# Altium PCB PCB1.PcbDoc
Units mm, origin at the board's own origin, x right, y up, seen from the top; angles counter-clockwise.
Board outline 16.76 x 25.02 mm, 2 copper layers (Top Layer, Bottom Layer); 10 components, 7 nets, 36 pads, 60 vias.
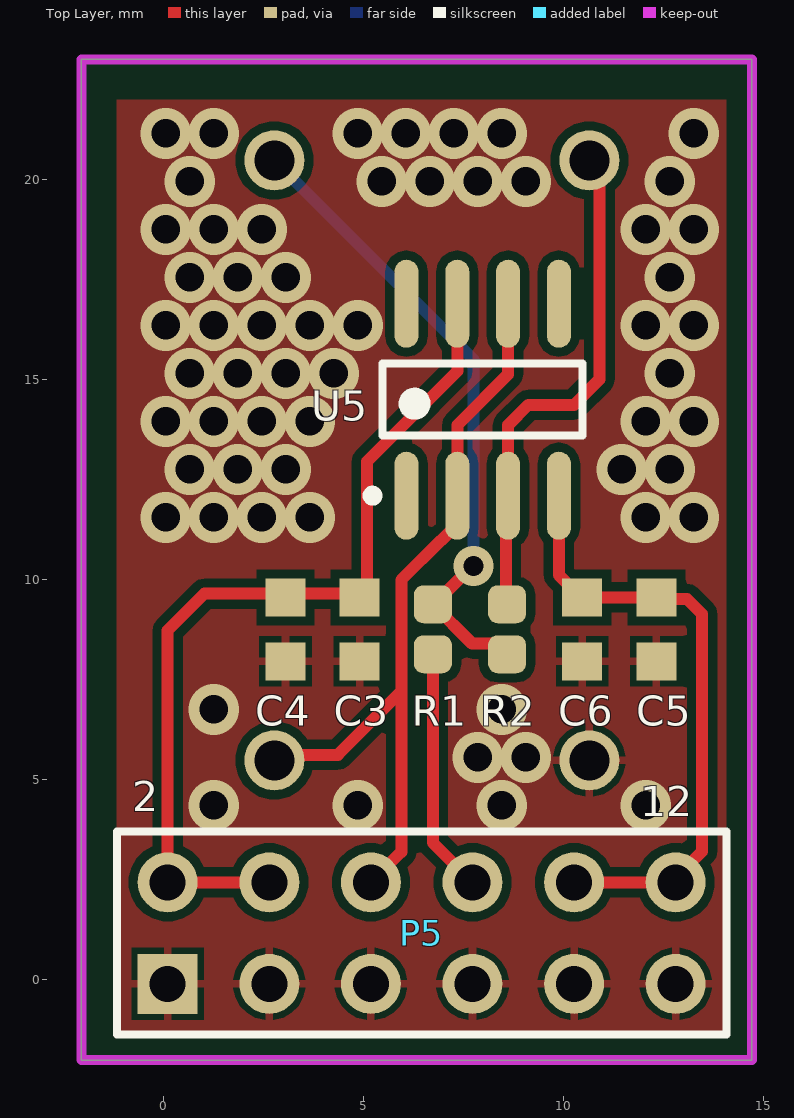
[diagram p0: Top Layer view]
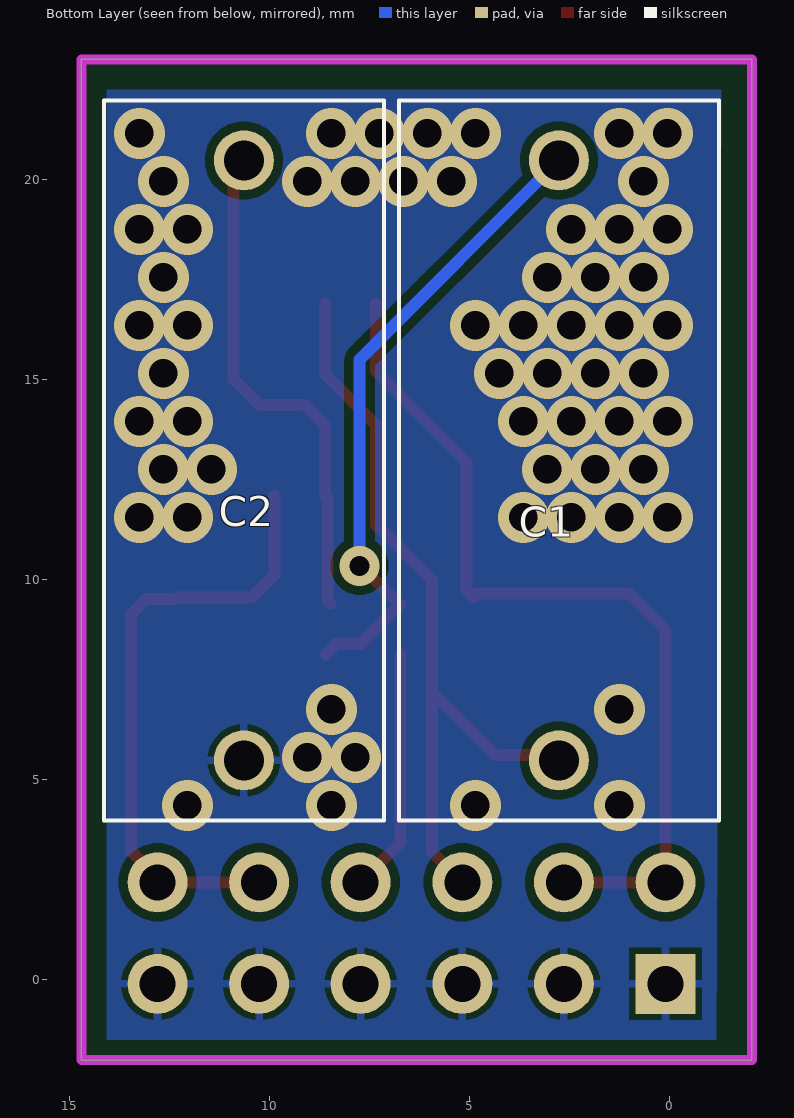
[diagram p1: Bottom Layer view, seen from below]
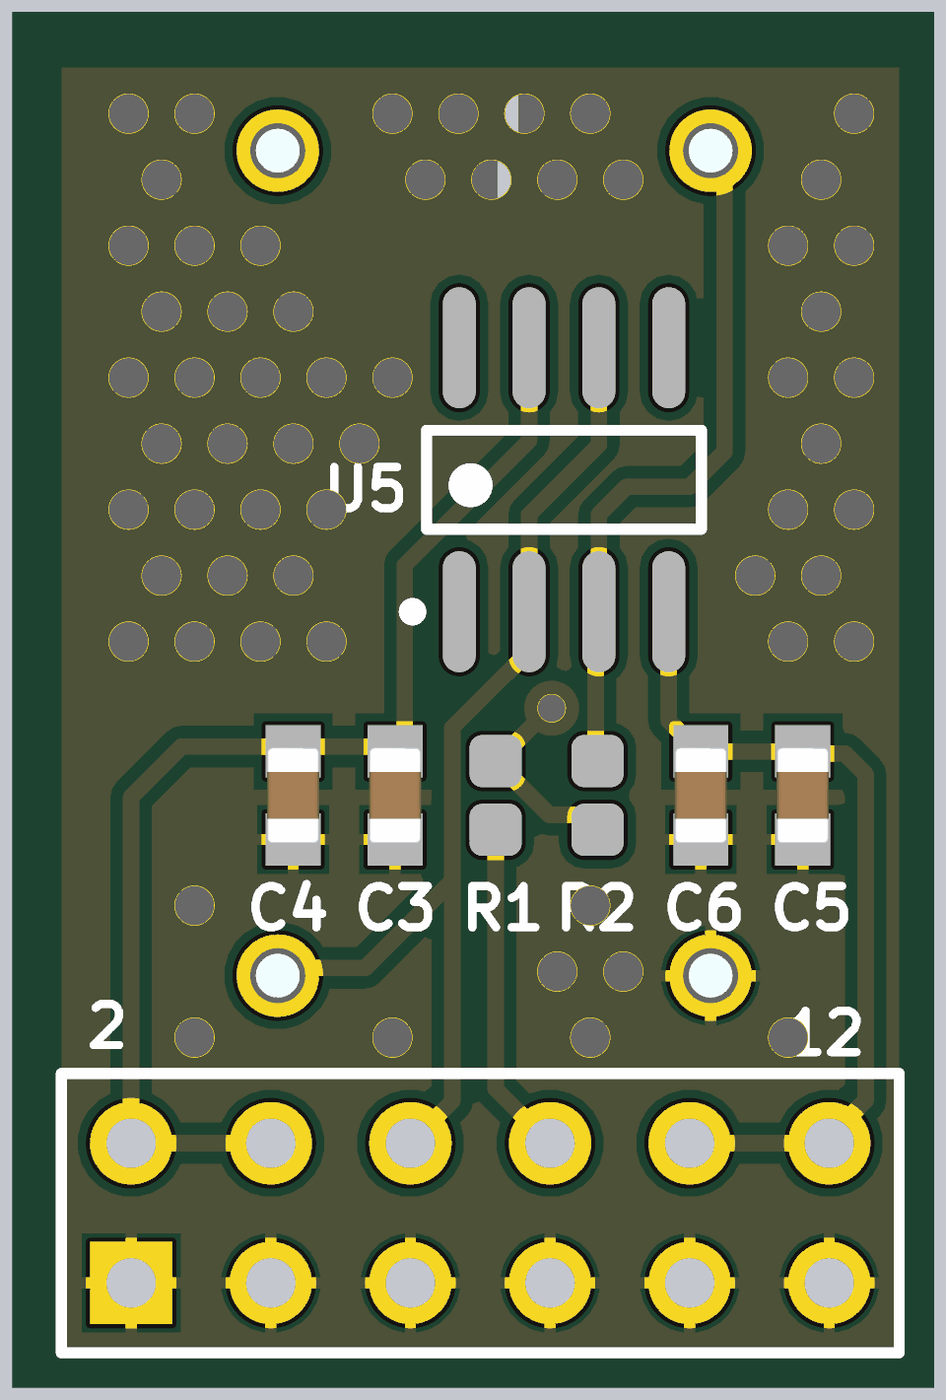
[diagram p2: 3D render of the assembled board from above, using the file's embedded part models]

## Layer stack, top to bottom
Top Solder: solder mask 0.0102, Solder Resist, Dk 3.5
Top Layer: signal copper 0.0356
Dielectric 1: dielectric 0.32, FR-4, Dk 4.8
Bottom Layer: signal copper 0.0356
Bottom Solder: solder mask 0.0102, Solder Resist, Dk 3.5

## Board outline
-2.057,-2.007 14.707,-2.007 14.707,23.012 -2.057,23.012

## Design rules (kind name [scope] priority, off if disabled: settings)
BoardOutlineClearance [All] p1: gap=0.381 ignorepadtopadclearanceinfootprint=FALSE
Clearance Clearance_Polygon [All vs InPoly] p1: gap=0.22 ignorepadtopadclearanceinfootprint=FALSE except(0: Arc-Hole Track-Hole SMDPad-Hole THPad-Hole Via-Hole Fill-Hole Poly-Hole Region-Hole Text-Hole)
Clearance [All] p2: gap=0.152 ignorepadtopadclearanceinfootprint=FALSE except(0: Arc-Hole Track-Hole SMDPad-Hole THPad-Hole Via-Hole Fill-Hole Poly-Hole Region-Hole Text-Hole)
ComponentClearance [All] p1 off: gap=0.025 collisioncheckmode=3 verticalgap=0.025 showdistances=FALSE
DiffPairsRouting [All] p1: maxlimit=10 minlimit=0.152 mostfreqgap=0.203 toplayer_minwidth=0.152 toplayer_maxwidth=0.381 toplayer_prefwidth=0.203 bottomlayer_minwidth=0.152 bottomlayer_maxwidth=0.381 bottomlayer_prefwidth=0.203 maxuncoupledlength=12.7
HoleSize [All] p1: absolutevalues=TRUE maxlimit=6.731 minlimit=0.33 maxpercent=80.000 minpercent=20.000
HoleToHoleClearance [All] p1: gap=0.254 allowstackedmicrovias=FALSE
MinimumAnnularRing [All] p1 off: minimumring=0.178
MinimumSolderMaskSliver [All] p1: minsoldermaskwidth=0
PlaneClearance [All] p1: clearance=0.254
PlaneConnect [All] p1: planeconnectstyle=Direct reliefexpansion=0.406 reliefentries=4 reliefconductorwidth=0.152 reliefairgap=0.152
PolygonConnect sticing [All vs IsStitchingVia] p1: connectstyle=Direct reliefconductorwidth=0.254 reliefentries=4 polygonreliefangle="90 Angle" airgapwidth=0.254
PolygonConnect [All] p2: connectstyle=Relief reliefconductorwidth=0.203 reliefentries=4 polygonreliefangle="90 Angle" airgapwidth=0.152
RoutingCorners [All] p1: cornerstyle=45-Degree minsetback=1.25 maxsetback=1.25
RoutingVias [All] p1: holewidth=0.381 width=0.762 viastyle="Through Hole" minholewidth=0.33 minwidth=0.686 maxholewidth=2.54 maxwidth=2.896
SilkToSilkClearance [All] p1: silktosilkclearance=0
SilkToSolderMaskClearance [IsPad] p1 off: minsilkscreentomaskgap=0.152 clearancetoexposedcopper=TRUE
SolderMaskExpansion [All] p1: expansion=0.075 istentingtop=FALSE
Width [All] p1: maxlimit=10.16 minlimit=0.152 preferedwidth=0.3
20 further rules are at their usual default settings.

## Components (designator, comment, footprint, x,y, rotation, side; value= is the part's Value field where it differs from the comment)
C1 "MKP4F036804F00KSSD" MKP4F036804F00KSSD 2.769,20.486 r270 bottom
C2 "MKP4D034704D00KSSD" MKP4D034704D00KSSD 10.643,5.486 r90 bottom
C3 "1uF" CAPC1608X87N 4.902,8.763 r90 top
C4 "100nF" CAPC1608X87N 3.048,8.763 r90 top
C5 "100nF" CAPC1608X87N 12.319,8.763 r90 top
C6 "1uF" CAPC1608X87N 10.465,8.763 r90 top
P5 "LPF mezzanine board" HDR2X6 0.102,-0.102 r0 top
R1 "100K" "Yegeo 0603" 6.731,8.763 r270 top
R2 "100K" "Yegeo 0603" 8.586,8.763 r270 top
U5 "OPA140AIDR" TI-D8_N 7.976,14.503 r90 top

## Footprints (in the part's own frame and the unit in brackets; to place one, negate y for a bottom-side part, rotate by r counter-clockwise, add the part's x,y. Pads: shape width x height; smd on the part's side, far side on the other; paste and mask are expansions set on the pad)
CAPC1608X87N [mm] "Chip Capacitor, Body 1.6x0.8mm IPC Medium Density"
  rect 0.95x1 smd: 1(-0.8,0) 2(0.8,0)
  body extent -0.87,-0.47 0.88,0.48, height 0.87
HDR2X6 [mm] "Connector; Header; 6x2 Position"
  rect 1.5x1.5 hole 0.9: 1(0,0)
  round 1.5 hole 0.9: 2(0,2.54) 3(2.54,0) 4(2.54,2.54) 5(5.08,0) 6(5.08,2.54) 7(7.62,0) 8(7.62,2.54) 9(10.16,0) 10(10.16,2.54) 11(12.7,0) 12(12.7,2.54)
  silkscreen extent -1.27,-1.27 13.97,3.81
MKP4D034704D00KSSD [mm]
  round 1.5 hole 1: 1(0,0) 2(15,0)
  silkscreen extent -1.5,-3.5 16.5,3.5, body extent -1.5,-3.5 16.5,3.5, height 14.1
MKP4F036804F00KSSD [mm]
  round 1.5 hole 1: 1(0,0) 2(15,0)
  silkscreen extent -1.5,-4 16.5,4, body extent -1.5,-4 16.5,4, height 15.1
TI-D8_N [mm] "SOIC, 8-Leads, Body 4.9x3.9mm, Pitch 1.27mm, IPC Medium Density"
  oval 2.2x0.6 smd: 1(-2.4,1.905) 2(-2.4,0.635) 3(-2.4,-0.635) 4(-2.4,-1.905) 5(2.4,-1.905) 6(2.4,-0.635) 7(2.4,0.635) 8(2.4,1.905)
  silkscreen extent -2.52,-2.5 0.9,2.88, body extent -2,-2.5 2,2.5, height 1.75
"Yegeo 0603" [mm]
  rrect50% 0.95x0.95 smd: 1(-0.625,0) 2(0.625,0)
  body extent -0.85,-0.45 0.85,0.45, height 0.8

## Part data
C1: "Capacitor", Manufacturer_Name=WIMA, Mouser Part Number=505-MKP4F036804F00KS, Arrow Part Number=MKP4F036804F00KSSD, Arrow Price/Stock=https://www.arrow.com/en/products/mkp4f036804f00kssd/wima, Datasheet Link=https://componentsearchengine.com/Datasheets/1/MKP4F036804F00KSSD.pdf, Height=15mm, Manufacturer_Part_Number=MKP4F036804F00KSSD, Mouser Price/Stock=https://www.mouser.co.uk/ProductDetail/WIMA/MKP4F036804F00KSSD?qs=7N384g6sXM%2Ff4ZVcxZrvpg%3D%3D
C2: "Capacitor", Manufacturer_Name=WIMA, Mouser Part Number=505-MKP4D034704D00KS, Datasheet Link=https://www.mouser.com/datasheet/2/440/e_WIMA_MKP_4-1139861.pdf, Height=14mm, Manufacturer_Part_Number=MKP4D034704D00KSSD, Mouser Price/Stock=https://www.mouser.co.uk/ProductDetail/WIMA/MKP4D034704D00KSSD?qs=OanN%252B0kfw%2FZgVh%2F%2FnXAWCg%3D%3D
C3 C6: library part CC0603_1UF_50V_10%_X5R, "Non-polarised capacitor", Case=0603, Manufacturer=GENERIC, Manufacturer1 ComponentHeight=0.9mm, Manufacturer1 Example=TDK, Manufacturer1 Part Number=C1608X5R1H105K080, Tolerance=±10%, Voltage=50V, Author="CERN DEM JMW", Component Type=Standard, CreateDate=09.11.2015, HelpURL=\\cern.ch\dfs\Applications\Altium\Datasheets\CC0603_X5R_TDK_C.pdf, LatestRevisionDate=09.11.2015, Manufacturer Part Number=CC0603_1UF_50V_10%_X5R, Mounted=Yes, Part Description="SMD Multilayer Chip Ceramic Capacitor", Part Number=CC0603_1UF_50V_10%_X5R, Pin Count=2, Sense=No, SMD=Yes, Socket=No, Status=None, TC=X5R
C4 C5: library part CC0603_100NF_50V_10%_X5R, "Non-polarised capacitor", Case=0603, Manufacturer=GENERIC, Manufacturer1 ComponentHeight=0.9mm, Manufacturer1 Example=TDK, Manufacturer1 Part Number=C1608X5R1H104K080AA, Tolerance=±10%, Voltage=50V, Author="CERN DEM MR", Component Type=Standard, CreateDate=08.01.2016, HelpURL=\\cern.ch\dfs\Applications\Altium\Datasheets\CC0603_X5R_TDK_C.pdf, LatestRevisionDate=08.01.2016, Manufacturer Part Number=CC0603_100NF_50V_10%_X5R, Mounted=Yes, Part Description="SMD Multilayer Chip Ceramic Capacitor", Part Number=CC0603_100NF_50V_10%_X5R, Pin Count=2, Sense=No, SMD=Yes, Socket=No, Status=None, TC=X5R
P5: library part "Header 6X2", "Header, 6-Pin, Dual row", LatestRevisionDate=17-Jul-2002, LatestRevisionNote="Re-released for DXP Platform.", Publisher="Altium Limited"
R1 R2: library part "Resistor 0805", Avail=20, Order=ERA-3AEB49R9V
U5: "11 MHz, Single Supply, Low Noise, Precision, Rail-to-Rail Output, JFET Amplifier, 4.5 to 36 V, -40 to 125 degC, 8-pin SOIC (D8), Green (RoHS & no Sb/Br)", Manufacturer="Texas Instruments", Rating=Catalog, Supplier Part Number 1=OPA140AIDR-ND, Total Supply Voltage(Max)(+5V is 5, +/-5V is 10)=36, Total Supply Voltage(Min)(+5V is 5, +/-5V is 10)=4.5, CMRR(Min)(dB)=126, Code_JEDEC=MS-012, ComponentLink1Description="Manufacturer URL", ComponentLink1URL=http://www.ti.com/, ComponentLink2Description=Datasheet, ComponentLink2URL=http://www.ti.com/lit/ds/symlink/opa140.pdf, ComponentLink3Description="Package Specification", ComponentLink3URL=http://www.ti.com/litv/pdf/msoi002j, DatasheetVersion=SBOS498A, Eco-Plan="Green (RoHS & no Sb/Br)", GBW(Typ)(MHz)=11, IIB(Max)(pA)=10, Iq per channel(Max)(mA)=2, Mounting Technology="Surface Mount", Number of Channels=1, Offset Drift(Typ)(uV/C)=0.35, PackageDescription="8-Pin Plastic Small Outline, Body 4.9 x 3.9 mm, Pitch 1.27 mm", PackageReference=D8, PackageVersion="4040047-3/M, 06/2011", Packing="LARGE T&R", PartNumber=OPA140AIDR, Slew Rate(Typ)(V/us)=20, Sub Family="High Supply Voltage Amplifier (>=30V), Low Input Bias Current Amp (<=10pA), Low Noise Amp (<=10nV/rtHz), Low Offset Voltage Amplifier (<=500uV), Precision Amplifier", Supplier 1=Digi-Key, Supplier 2=Newark, Supplier 3=Mouser, Supplier Part Number 2=21T3836, Supplier Part Number 3=595-OPA140AIDR, Vio (25C)(Max)(mV)=0.12

## Via types
v1: diameter 1.27, hole 0.711, Top Layer to Bottom Layer, tented both sides, 59 vias
v2: diameter 1, hole 0.5, Top Layer to Bottom Layer, tented both sides, 1 vias

## Nets (pads, with @x,y where several pads share a name; then routed paths per layer and width w, separated by ;. In a path a pad name is that pad's centre, name@x,y a point inside that pad or via, vN(x,y) a via of type N, cw(c..) or ccw(c..) an arc to the next point about the centre after c; other vN are vias at no path point)
+15V: C3.2 C4.2 P5.2 P5.4 U5.7 | length 22.4
  Top Layer w0.3: P5.4 P5.2 0.102,8.738 1.016,9.652 3.95,9.652 4.813,9.652 C3.2 5.08,9.741 5.08,12.954 7.341,15.215 7.341,16.154 U5.7
-15V: C5.2 C6.2 P5.10 P5.12 U5.4 | length 15.7
  Top Layer w0.3: U5.4 9.881,10.122 10.44,9.563 C6.2 C5.2 12.357,9.525 13.081,9.525 13.462,9.144 13.462,3.214 12.802,2.554 P5.12 P5.10 P5.10@10.262,2.611
AGND: C2.1 C3.1 C4.1 C5.1 C6.1 P5.1 P5.3 P5.5 P5.7 P5.9 P5.11
  other v1: 1.254,4.36 4.854,4.36 8.454,4.36 12.054,4.36 7.854,5.56 9.054,5.56 1.254,6.76 8.454,6.76 0.054,11.56 1.254,11.56 2.454,11.56 3.654,11.56 12.054,11.56 13.254,11.56 0.654,12.76 1.854,12.76 3.054,12.76 11.454,12.76 12.654,12.76 0.054,13.96 1.254,13.96 2.454,13.96 3.654,13.96 12.054,13.96 13.254,13.96 0.654,15.16 1.854,15.16 3.054,15.16 4.254,15.16 12.654,15.16 0.054,16.36 1.254,16.36 2.454,16.36 3.654,16.36 4.854,16.36 12.054,16.36 13.254,16.36 0.654,17.56 1.854,17.56 3.054,17.56 12.654,17.56 0.054,18.76 1.254,18.76 2.454,18.76 12.054,18.76 13.254,18.76 0.654,19.96 5.454,19.96 6.654,19.96 7.854,19.96 9.054,19.96 12.654,19.96 0.054,21.16 1.254,21.16 4.854,21.16 6.054,21.16 7.254,21.16 8.454,21.16 13.254,21.16
NetC1_1: C1.1 R1.1 R2.2 | length 16.2
  Top Layer w0.3: v2(7.751,10.349) 7.722,10.349 6.761,9.388 R1.1 7.71,8.409 8.315,8.409 R2.2
  Bottom Layer w0.3: C1.1@2.515,20.486 C1.1 7.751,15.504 v2(7.751,10.349)
NetC1_2: C1.2 P5.6 U5.2 U5.6 | length 20
  Top Layer w0.3: C1.2@2.515,5.296 C1.2@2.515,5.486 ; C1.2 2.909,5.627 4.357,5.627 5.944,7.214 ; P5.6 5.944,3.2 5.944,7.214 ; U5.6 8.611,15.138 7.341,13.868 U5.2 7.341,11.385 6.94,10.984 6.929,10.984 5.944,9.999 5.944,7.214
NetC2_2: C2.2 R2.1 U5.3 | length 12.8
  Top Layer w0.3: R2.1@8.484,9.413 8.553,9.483 8.553,12.046 U5.3 8.611,13.868 9.119,14.376 10.262,14.376 10.897,15.011 10.897,20.359 C2.2@10.77,20.486
NetP5_8: P5.8 R1.2 | length 6.3
  Top Layer w0.3: R1.2 6.731,3.429 P5.8 P5.8@7.722,2.611
pads on no net: U5.1 U5.5 U5.8

## Polygon pours and split planes (outlines as drawn)
AGND on Top Layer "AGND_L01_P000" (solid, pour order 0): 14.072,-1.372 14.072,21.996 -1.168,21.996 -1.168,-1.372
AGND on Bottom Layer "AGND_L02_P001" (solid, pour order 1): -1.295,21.996 -1.295,22.25 14.072,22.25 14.072,-1.499 -1.168,-1.499

## Keep-outs
Keep-Out Layer:
  the board outline again, w0.254

## Text inside footprints (layer, text, board x,y; h text height)
P5: Top Overlay "12" at 11.913,4.089 h0.75; Top Overlay "2" at -0.787,4.216 h0.75